# EAGLE board lock-board_lock_v3 (EAGLE 7.6.0)
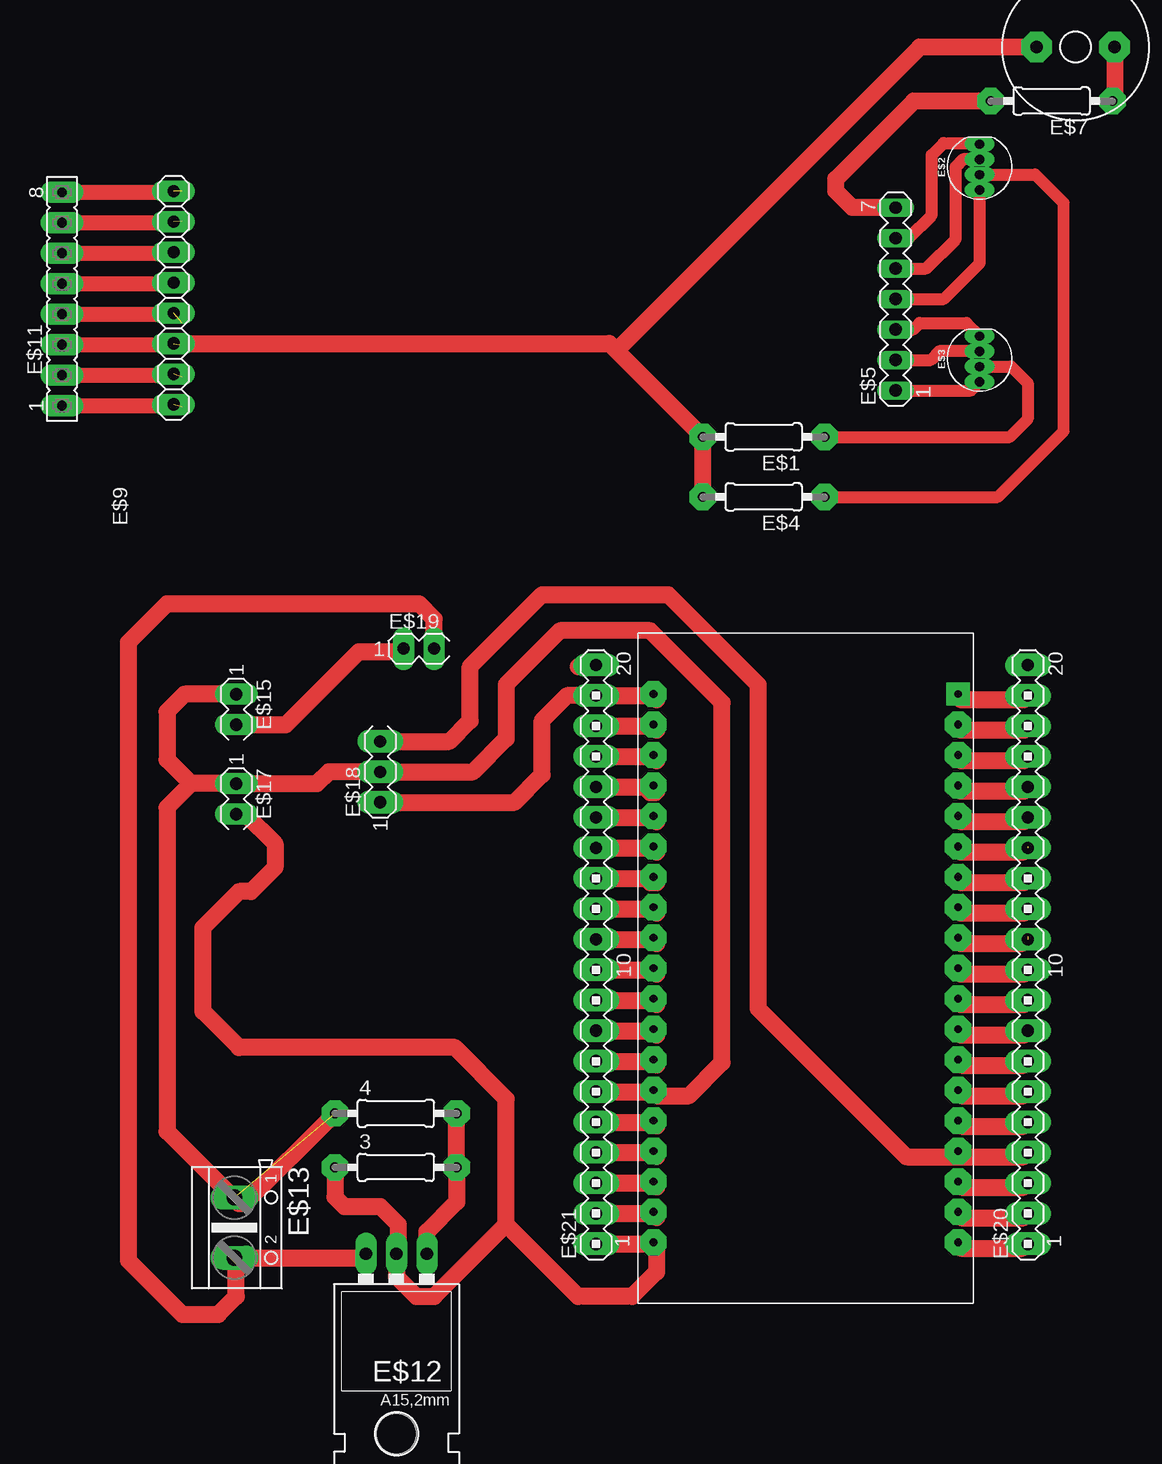
[diagram p0: board, top side]
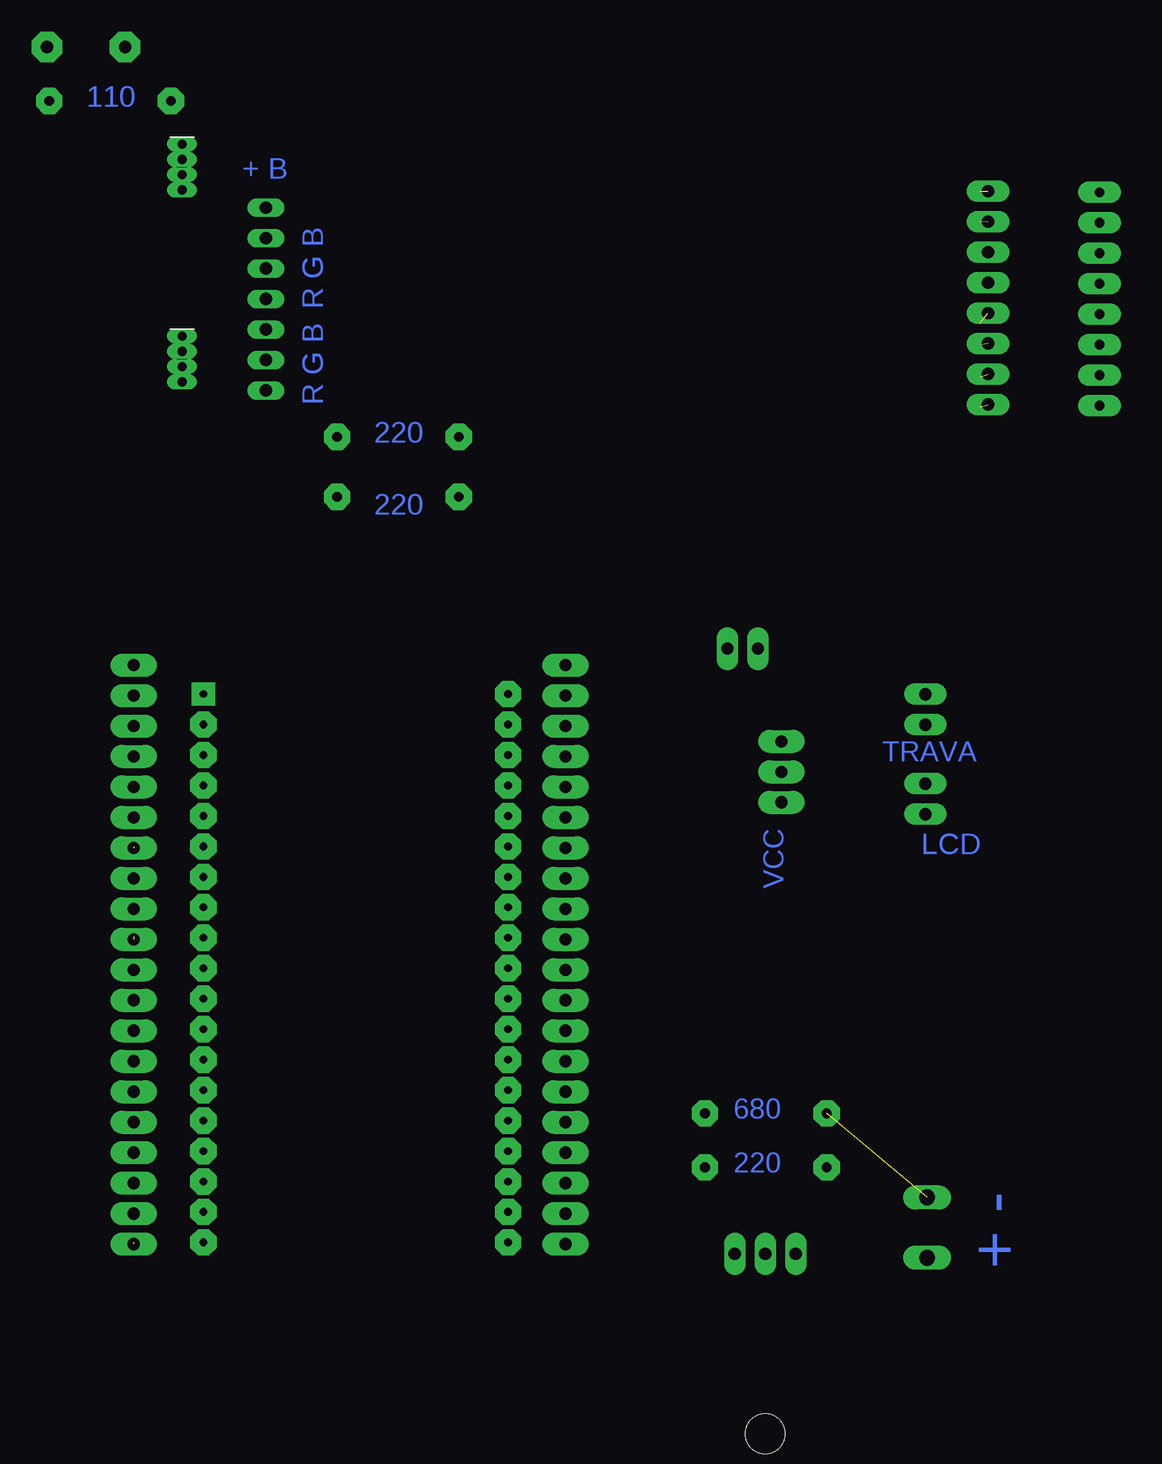
[diagram p1: board, bottom side, seen from below]

No outline drawn. Coordinates in mm, seen from the top.
Copper layers (1*16): Top 0.035mm / dielectric 1.5mm / Bottom 0.035mm
Design rules "default": minimum track width 10mil, minimum drill 24mil, track to track 8mil, track to pad 8mil, pad to pad 8mil, via to via 8mil, smd to smd 8mil, copper to edge 40mil, drill to drill 8mil, minimum pad ring 10mil, minimum via ring 8mil, stop-mask expansion 4mil, vias tented up to drill 0mil, thermal gap 10mil

## Footprints (pad centres in the part's own frame; a part is rotated, then mirrored left to right if it is on the bottom)
0207/10 = drill 0.813 pad 2.184 octagon: 1 -5.08,0; 2 5.08,0
LED-RGB-THRU = drill 0.762 pad 0.889 long: 1 1.905,0; 2 0.635,0; 3 -0.635,0; 4 -1.905,0
MA07-1 = drill 1.016 long: 1 -7.62,0; 2 -5.08,0; 3 -2.54,0; 4 0,0; 5 2.54,0; 6 5.08,0; 7 7.62,0
AL60P = drill 1.016 pad 2.54 octagon: 1 -3.251,0; 2 3.251,0
RFID-RC522 = drill 1.016 pad 1.778 long: 3V3 -8.89,0; GND -3.81,0; IRQ -1.27,0; MISO 1.27,0; MOSI 3.81,0; RST -6.35,0; SCK 6.35,0; SS 8.89,0
ESP32 = drill 0.6 pad 1.93 square: P$20 -60.96,-30.48 | drill 0.65 pad 2.184 octagon: P$21 -60.96,-27.94; P$41 -60.96,-25.4; P$42 -60.96,-22.86; P$43 -60.96,-20.32; P$44 -60.96,-17.78; P$45 -60.96,-15.24; P$46 -60.96,-12.7; P$47 -60.96,-10.16; P$48 -60.96,-7.62; P$49 -60.96,-5.08; P$50 -60.96,-2.54; P$51 -60.96,0; P$52 -60.96,2.54; P$53 -60.96,5.08; P$54 -60.96,7.62; P$55 -60.96,10.16; P$56 -60.96,12.7; P$57 -60.96,15.24; P$58 -35.56,15.24; P$59 -35.56,12.7; P$60 -35.56,10.16; P$61 -35.56,7.62; P$62 -35.56,5.08; P$63 -35.56,2.54; P$64 -35.56,0; P$65 -35.56,-2.54; P$66 -35.56,-5.08; P$67 -35.56,-7.62; P$68 -35.56,-10.16; P$69 -35.56,-12.7; P$70 -35.56,-15.24; P$71 -35.56,-17.78; P$72 -35.56,-20.32; P$73 -35.56,-22.86; P$74 -35.56,-25.4; P$75 -35.56,-27.94; P$76 -35.56,-30.48
FE08 = drill 0.813 pad 1.778 long: 1 -8.89,0; 2 -6.35,0; 3 -3.81,0; 4 -1.27,0; 5 1.27,0; 6 3.81,0; 7 6.35,0; 8 8.89,0
317TL = drill 1.016 pad 1.778 long: 1 -2.54,-3.81; 2 0,-3.81; 3 2.54,-3.81 | hole 3.302: 0,11.176
AK500/2 = drill 1.321 long: 1 -2.515,0; 2 2.515,0
MA03-1 = drill 1.016 pad 1.778 long: 1 -2.54,0; 2 0,0
MA04-1 = drill 1.016 pad 1.93 long: 1 -3.81,0; 2 -1.27,0; 3 1.27,0
MA20-1 = drill 1.016 pad 1.93 long: 1 -24.13,0; 2 -21.59,0; 3 -19.05,0; 4 -16.51,0; 5 -13.97,0; 6 -11.43,0; 7 -8.89,0; 8 -6.35,0; 9 -3.81,0; 10 -1.27,0; 11 1.27,0; 12 3.81,0; 13 6.35,0; 14 8.89,0; 15 11.43,0; 16 13.97,0; 17 16.51,0; 18 19.05,0; 19 21.59,0; 20 24.13,0

## Placement (x,y rotation side)
3  [0207/10]  150.08,10.02 0 top
4  [0207/10]  150.08,14.52 0 top
E$1  [0207/10]  180.75,70.91 180 top
E$2  [LED-RGB-THRU]  198.75,93.41 90 top
E$3  [LED-RGB-THRU]  198.75,77.41 90 top
E$4  [0207/10]  180.75,65.91 180 top
E$5  [MA07-1]  191.75,82.41 90 top
E$6  [AL60P]  206.75,103.41 0 top
E$7  [0207/10]  204.75,98.91 180 top
E$9  [RFID-RC522]  131.55,82.51 90 top
E$10  [ESP32]  136,19 180 top
E$11  [FE08]  122.25,82.41 90 top
E$12  [317TL]  150.13,-1 180 top
E$13  [AK500/2]  136.63,5 270 top
E$15  [MA03-1]  136.78,46.92 270 top
E$17  [MA03-1]  136.78,39.46 270 top
E$18  [MA04-1]  148.78,44.26 90 top
E$19  [MA03-1]  153.28,53.26 0 top
E$20  [MA20-1]  202.78,27.76 90 top
E$21  [MA20-1]  166.78,27.76 90 top

## Library data of the parts
3 4 E$1 E$4 E$7 = eagle-ltspice
E$2 E$3 = SparkFun-LED
E$5 E$15 E$17-E$21 = con-lstb
E$6 = buzzer
E$9 = mfrc522-module
E$10 = esp32
E$11 = con-lsta
E$12 = v-reg
E$13 = con-ptr500

## Nets
S$1: E$9.SS E$11.8
S$2: E$9.SCK E$11.7
S$3: E$11.6
S$4: E$9.MISO E$11.5
S$5: E$9.IRQ
S$6: E$11.4
S$7: E$1.2 E$4.2 E$6.1 E$9.GND E$11.3
S$8: E$9.RST E$11.2
S$9: 3.2 4.2 E$12.1
S$10: E$9.3V3 E$11.1
S$11: E$1.1 E$3.3
S$12: E$2.3 E$4.1
S$13: E$3.4 E$5.1
S$14: E$5.7 E$7.2
S$15: E$6.2 E$7.1
S$16: E$3.2 E$5.2
S$17: E$3.1 E$5.3
S$18: E$2.4 E$5.4
S$19: E$2.2 E$5.5
S$20: E$2.1 E$5.6
S$46: E$12.3 E$13.2 E$19.2
S$48: E$15.2 E$19.1
S$49: E$20.1
S$50: E$20.2
S$51: E$20.3
S$52: E$18.3 E$20.4
S$53: E$20.5
S$54: E$20.6
S$55: E$20.7
S$56: E$20.8
S$57: E$20.9
S$58: E$20.10
S$59: E$20.11
S$60: E$20.12
S$61: E$20.13
S$62: E$20.14
S$63: E$20.15
S$64: E$20.16
S$65: E$20.17
S$66: E$20.18
S$67: E$20.19
S$68: 3.1 E$12.2 E$17.2 E$21.1
S$69: E$21.2
S$70: E$21.3
S$71: E$21.4
S$72: E$21.5
S$73: 4.1 E$13.1 E$15.1 E$17.1 E$18.2 E$21.6
S$74: E$21.7
S$75: E$21.8
S$76: E$21.9
S$77: E$21.10
S$78: E$21.11
S$79: E$21.12
S$80: E$21.13
S$81: E$21.14
S$82: E$21.15
S$83: E$21.16
S$84: E$21.17
S$85: E$21.18
S$86: E$18.1 E$21.19
S$87: E$21.20

## Tracks (layer width: path | path; a pad name or v marks a point on that pad's centre or on a via)
S$1  (1 unrouted)
  Top 1.27: E$11.8 132.14,91.3 132.25,91.41
S$2  (1 unrouted)
  Top 1.27: E$11.7 132.1,88.76 132.25,88.91
S$3
  Top 1.27: E$11.6 132.44,86.22
S$4
  Top 1.27: E$11.5 131.45,83.68 E$9.MISO
S$5  (1 unrouted)
S$6
  Top 1.27: E$11.4 131.52,81.14
S$7  (1 unrouted)
  Top 1.27: E$11.3 132.06,78.6 132.25,78.41
  Top 1.422: E$9.GND 167.88,78.7 168.46,78.12 | 168.46,78.12 E$1.2 E$4.2 | E$6.1 193.75,103.41 168.46,78.12
S$8  (1 unrouted)
  Top 1.27: E$11.2 132.1,76.06 132.25,75.91
S$9
  Top 1.422: E$12.1 152.67,4.65 155.16,7.14 3.2 4.2
S$10  (1 unrouted)
  Top 1.27: E$11.1 132.14,73.52 132.25,73.41
S$11
  Top 1.016: E$1.1 201.25,70.91 202.75,72.41 202.75,75.41 201.38,76.78 E$3.3
S$12
  Top 1.016: E$4.1 200.25,65.91 205.75,71.41 205.75,90.41 203.38,92.78 E$2.3
S$13
  Top 1.016: E$5.1 198.03,74.79 E$3.4
S$14
  Top 1.422: E$5.7 188.13,90.03 186.75,91.41 186.75,92.41 193.25,98.91 E$7.2
S$15
  Top 1.422: E$6.2 210,99.08 E$7.1
S$16
  Top 1.016: E$5.2 194.67,77.33 195.38,78.05 E$3.2
S$17
  Top 1.016: E$5.3 193.21,79.87 193.75,80.41 197.66,80.41 E$3.1
S$18
  Top 1.016: E$5.4 195.75,82.41 198.75,85.41 E$2.4
S$19
  Top 1.016: E$5.5 194.29,84.95 196.75,87.41 196.75,93.41 197.38,94.05 E$2.2
S$20
  Top 1.016: E$5.6 192.83,87.49 194.75,89.41 194.75,94.41 195.75,95.41 198.66,95.41 E$2.1
S$46
  Top 1.422: E$13.2 137,2.48 | E$13.2 136.78,2.33 136.78,-0.74 135.28,-2.24 132.28,-2.24 127.78,2.26 127.78,53.78 131,57 152,57 153.28,55.72 E$19.2 | E$13.2 147.26,2.48 E$12.3
S$48
  Top 1.422: E$15.2 140.92,46.92 147,53 150.48,53 E$19.1
S$49  (1 unrouted)
  Top 1.422: 197.22,3.28 202.3,3.28 202.78,3.76
S$50
  Top 1.422: 197.22,5.82 202.43,5.82 E$20.2
S$51
  Top 1.422: 197.22,8.36 202.43,8.36 E$20.3
S$52
  Top 1.422: E$20.4 202.43,10.9 192.64,10.9 180.28,23.26 180.28,50.26 172.78,57.76 162.28,57.76 156.28,51.76 156.28,47.26 154.55,45.53 E$18.3
S$53
  Top 1.422: 197.22,13.44 202.43,13.44 E$20.5
S$54
  Top 1.422: 197.22,15.98 202.43,15.98 E$20.6
S$55
  Top 1.422: 197.22,18.52 202.43,18.52 E$20.7
S$56
  Top 1.422: 197.22,21.06 202.43,21.06 E$20.8
S$57
  Top 1.422: 197.22,23.6 202.43,23.6 E$20.9
S$58
  Top 1.422: 197.22,26.14 202.43,26.14 E$20.10
S$59  (1 unrouted)
  Top 1.422: 197.22,28.68 202.2,28.68 202.78,29.26
S$60
  Top 1.422: 197.22,31.22 202.43,31.22 E$20.12
S$61
  Top 1.422: 197.22,33.76 202.43,33.76 E$20.13
S$62  (1 unrouted)
  Top 1.422: 197.22,36.3 202.32,36.3 202.78,36.76
S$63
  Top 1.422: 197.22,38.84 202.43,38.84 E$20.15
S$64
  Top 1.422: 197.22,41.38 202.43,41.38 E$20.16
S$65
  Top 1.422: 197.22,43.92 202.43,43.92 E$20.17
S$66
  Top 1.422: 197.22,46.46 202.43,46.46 E$20.18
S$67
  Top 1.422: 197.22,49 202.43,49 E$20.19
S$68
  Top 1.422: E$21.1 171.15,3.63 171.28,3.76 171.34,3.76 171.82,3.28 171.82,1.3 169.78,-0.74 165.28,-0.74 159.28,5.26 | 3.1 145,7.54 145.78,6.76 148.78,6.76 150.28,5.26 150.28,2.96 E$12.2 150.13,0.91 151.78,-0.74 153.28,-0.74 159.28,5.26 | E$17.2 137.54,39.46 140,37 140,35 138,33 137,33 136,32 135,31 134,30 134,23 137,20 155,20 159.28,15.72 159.28,5.26
S$69
  Top 1.422: E$21.2 171.47,6.17 171.82,5.82
S$70
  Top 1.422: E$21.3 171.47,8.71 171.82,8.36
S$71
  Top 1.422: E$21.4 171.27,11.25 171.28,11.26 171.46,11.26 171.82,10.9
S$72
  Top 1.422: E$21.5 171.47,13.79 171.82,13.44
S$73  (1 unrouted)
  Top 1.422: E$21.6 171.47,16.33 171.82,15.98 174.5,15.98 177.28,18.76 177.28,48.76 171.28,54.76 163.78,54.76 159.28,50.26 159.28,45.76 156.51,42.99 E$18.2 144.51,42.99 143.52,42 E$17.1 133,42 | E$15.1 132.46,49.46 131,48 131,44 133,42 | 133,42 131,40 131,13 137,7 137.48,7 4.1
S$74
  Top 1.422: E$21.7 171.17,18.87 171.28,18.76 171.58,18.76 171.82,18.52
S$75
  Top 1.422: E$21.8 171.47,21.41 171.82,21.06
S$76
  Top 1.422: E$21.9 171.47,23.95 171.82,23.6
S$77
  Top 1.422: E$21.10 171.47,26.49 171.82,26.14
S$78
  Top 1.422: E$21.11 171.47,29.03 171.82,28.68
S$79
  Top 1.422: E$21.12 171.47,31.57 171.82,31.22
S$80
  Top 1.422: E$21.13 170.93,34.11 171.28,33.76 171.82,33.76
S$81
  Top 1.422: E$21.14 171.47,36.65 171.82,36.3
S$82
  Top 1.422: E$21.15 171.47,39.19 171.82,38.84
S$83
  Top 1.422: E$21.16 170.81,41.73 171.28,41.26 171.7,41.26 171.82,41.38
S$84
  Top 1.422: E$21.17 171.47,44.27 171.82,43.92
S$85
  Top 1.422: E$21.18 171.47,46.81 171.82,46.46
S$86
  Top 1.422: 171.82,49 171.47,49.35 E$21.19 164.37,49.35 162.28,47.26 162.28,42.76 159.97,40.45 E$18.1
S$87
  Top 1.422: 165.28,51.76 166.65,51.76 E$21.20

## Text on the board
Bottom: 110 | + B | R G B | R G B | 220 | 220 | TRAVA | LCD | VCC | 680 | 220 | + -